# Altium PCB PCB1.PcbDoc
Units mm, origin at the board's own origin, x right, y up, seen from the top; angles counter-clockwise.
Board outline 20.16 x 24.36 mm, 2 copper layers (Top Layer, Bottom Layer); 1 components, 0 nets, 7 pads, 163 vias.
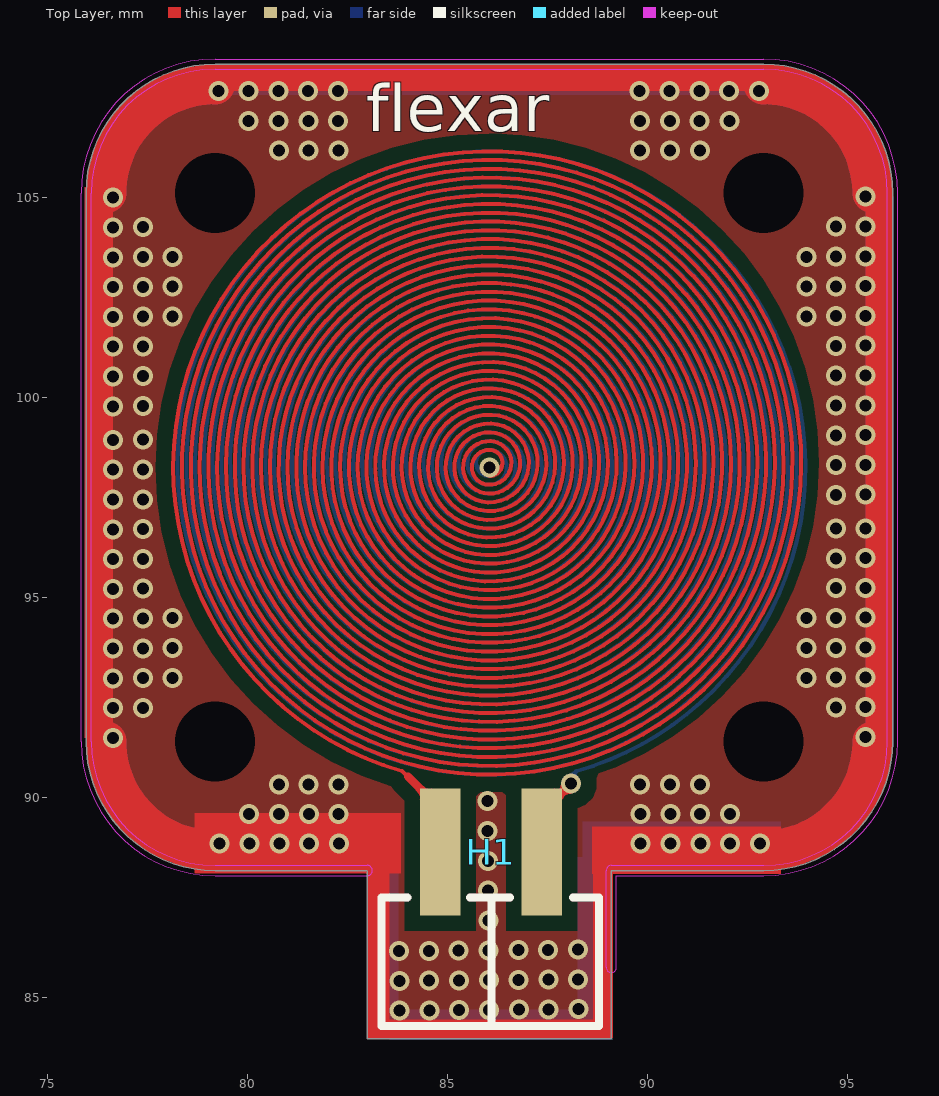
[diagram p0: Top Layer view]
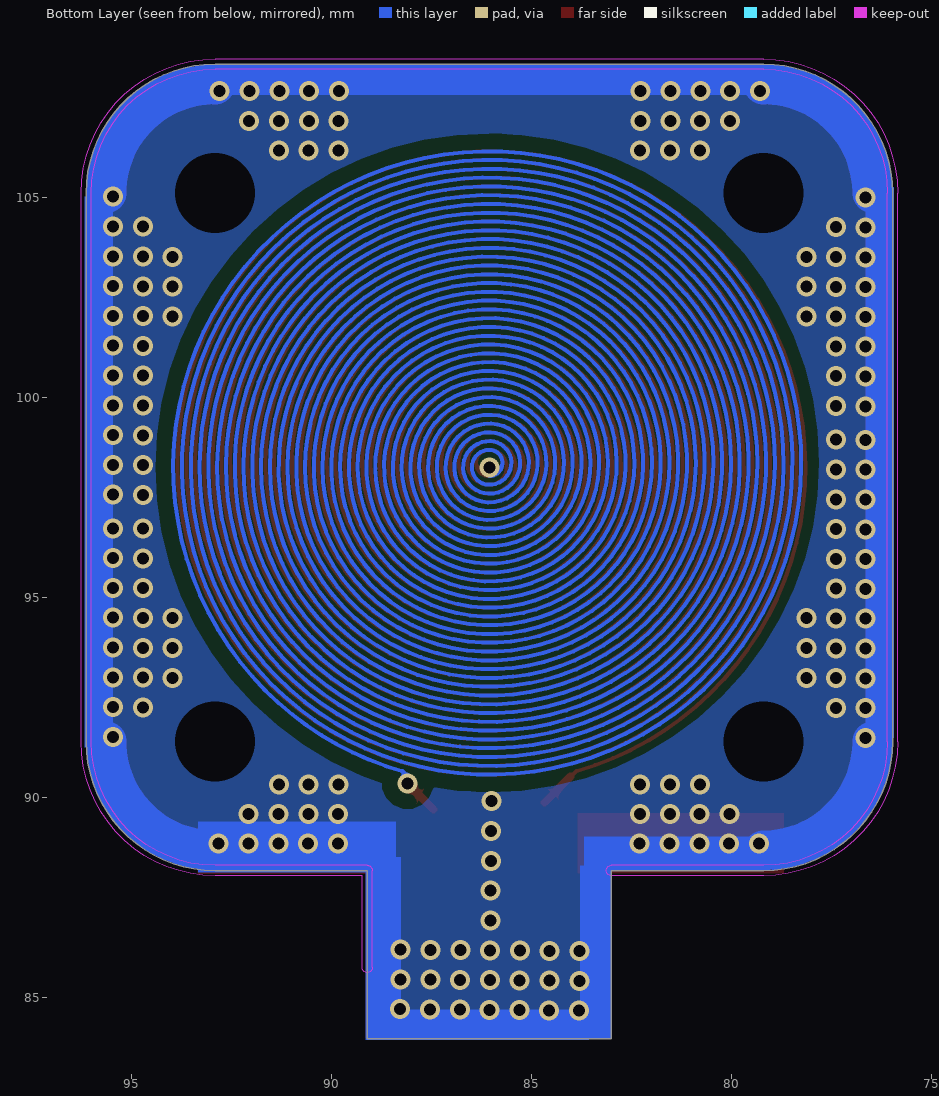
[diagram p1: Bottom Layer view, seen from below]

## Layer stack, top to bottom
Top Solder: solder mask 0.0102, Solder Resist, Dk 3.5
Top Layer: signal copper 0.0356
Dielectric 1: dielectric 0.32, FR-4, Dk 4.8
Bottom Layer: signal copper 0.0356
Bottom Solder: solder mask 0.0102, Solder Resist, Dk 3.5

## Board outline
79.201,88.183 cw(c79.201,91.406) 75.977,91.406 75.977,105.119 cw(c79.201,105.119) 79.201,108.343 92.914,108.343 cw(c92.914,105.119) 96.138,105.119 96.138,91.406 cw(c92.914,91.406) 92.914,88.183 89.108,88.183 89.108,83.981 83.006,83.981 83.006,88.183

## Design rules (kind name [scope] priority, off if disabled: settings)
Clearance [All] p1: gap=0.254 ignorepadtopadclearanceinfootprint=FALSE except(0: Arc-Hole Track-Hole SMDPad-Hole THPad-Hole Via-Hole Fill-Hole Poly-Hole Region-Hole Text-Hole)
PolygonConnect [All] p1: connectstyle=Relief reliefconductorwidth=0.254 reliefentries=4 polygonreliefangle="90 Angle" airgapwidth=0.254
RoutingVias [All] p1: holewidth=0.711 width=1.27 viastyle="Through Hole" minholewidth=0.711 minwidth=1.27 maxholewidth=0.711 maxwidth=1.27
SolderMaskExpansion [All] p1: expansion=0 istentingtop=FALSE
Width [All] p1: maxlimit=0.254 minlimit=0.254 preferedwidth=0.254
30 further rules are at their usual default settings.

## Components (designator, comment, footprint, x,y, rotation, side; value= is the part's Value field where it differs from the comment)
H1 "H2P2.54" M20-8890245R 86.715,90.951 r180 top

## Footprints (in the part's own frame and the unit in brackets; to place one, negate y for a bottom-side part, rotate by r counter-clockwise, add the part's x,y. Pads: shape width x height; smd on the part's side, far side on the other; paste and mask are expansions set on the pad)
M20-8890245R [mm]
  rect 1.02x3.17 smd: 1(-0.653,2.307) 2(1.887,2.307)
  silkscreen extent -2.08,3.44 3.35,6.65, body extent -1.92,0.84 3.16,12.34, height 2.5

## Free pads (board coordinates)
  round 0 hole 2: ""(79.201,91.406) ""(79.201,105.119) ""(92.914,91.406) ""(92.914,105.119) ""(92.914,105.119)

## Via types
v1: diameter 0.5, hole 0.3, Top Layer to Bottom Layer, tented both sides, 163 vias

## Nets (pads, with @x,y where several pads share a name; then routed paths per layer and width w, separated by ;. In a path a pad name is that pad's centre, name@x,y a point inside that pad or via, vN(x,y) a via of type N, cw(c..) or ccw(c..) an arc to the next point about the centre after c; other vN are vias at no path point)
pads on no net: H1.1 H1.2
copper on no net: | length 1843.7
  Top Layer w0.1: 83.879,90.666 cw(c86.057,98.263) 86.373,106.16 cw(c86.062,98.373) 85.751,90.585 cw(c86.057,98.263) 86.364,105.94 cw(c86.062,98.373) 85.759,90.805 cw(c86.057,98.263) 86.355,105.721 cw(c86.062,98.373) 85.768,91.024 cw(c86.057,98.263) 86.347,105.501 cw(c86.062,98.373) 85.777,91.244 cw(c86.057,98.263) 86.338,105.282 cw(c86.062,98.373) 85.786,91.463 cw(c86.057,98.263) 86.329,105.063 cw(c86.062,98.373) 85.795,91.682 cw(c86.057,98.263) 86.32,104.843 cw(c86.062,98.373) 85.803,91.902 cw(c86.057,98.263) 86.312,104.624 cw(c86.062,98.373) 85.812,92.121 cw(c86.057,98.263) 86.303,104.404 cw(c86.062,98.373) 85.821,92.341 cw(c86.057,98.263) 86.294,104.185 cw(c86.062,98.373) 85.83,92.56 cw(c86.057,98.263) 86.285,103.965 cw(c86.062,98.373) 85.838,92.78 cw(c86.057,98.263) 86.277,103.746 cw(c86.062,98.373) 85.847,92.999 cw(c86.057,98.263) 86.268,103.526 cw(c86.062,98.373) 85.856,93.219 cw(c86.057,98.263) 86.259,103.307 cw(c86.062,98.373) 85.865,93.438 cw(c86.057,98.263) 86.25,103.087 cw(c86.062,98.373) 85.873,93.658 cw(c86.057,98.263) 86.241,102.868 cw(c86.062,98.373) 85.882,93.877 cw(c86.057,98.263) 86.233,102.648 cw(c86.062,98.373) 85.891,94.097 cw(c86.057,98.263) 86.224,102.429 cw(c86.062,98.373) 85.9,94.316 cw(c86.057,98.263) 86.215,102.21 cw(c86.062,98.373) 85.909,94.535 cw(c86.057,98.263) 86.206,101.99 cw(c86.062,98.373) 85.917,94.755 cw(c86.057,98.263) 86.198,101.771 cw(c86.062,98.373) 85.926,94.974 cw(c86.057,98.263) 86.189,101.551 cw(c86.062,98.373) 85.935,95.194 cw(c86.057,98.263) 86.18,101.332 cw(c86.062,98.373) 85.944,95.413 cw(c86.057,98.263) 86.171,101.112 cw(c86.062,98.373) 85.952,95.633 cw(c86.057,98.263) 86.163,100.893 cw(c86.062,98.373) 85.961,95.852 cw(c86.057,98.263) 86.154,100.673 cw(c86.062,98.373) 85.97,96.072 cw(c86.057,98.263) 86.145,100.454 cw(c86.062,98.373) 85.979,96.291 cw(c86.057,98.263) 86.136,100.234 cw(c86.062,98.373) 85.987,96.511 cw(c86.057,98.263) 86.127,100.015 cw(c86.062,98.373) 85.996,96.73 cw(c86.057,98.263) 86.119,99.796 cw(c86.062,98.373) 86.005,96.949 cw(c86.057,98.263) 86.11,99.576 cw(c86.062,98.373) 86.014,97.169 cw(c86.057,98.263) 86.101,99.357 cw(c86.062,98.373) 86.023,97.388 cw(c86.057,98.263) 86.092,99.137 cw(c86.062,98.373) 86.031,97.608 cw(c86.057,98.263) 86.084,98.918 cw(c86.062,98.373) 86.04,97.827 cw(c86.057,98.263) 86.057,98.699 cw(c86.062,98.373) 86.057,98.046 v1(86.057,98.263)
  Top Layer w0.102: 83.879,90.666 84.526,90.018
  Top Layer w0.2: 84.026,90.531 84.674,89.884 ; 87.454,89.708 v1(88.102,90.356)
  Top Layer w1: v1@76.481,91.406 ccw(c79.201,91.406) v1@79.201,88.686 ; v1@76.481,105.119 cw(c79.201,105.119) v1@79.201,107.839 ; v1@92.914,88.686 ccw(c92.914,91.406) v1@95.634,91.406 ; v1@92.914,107.839 cw(c92.914,105.119) v1@95.634,105.119
  Bottom Layer w0.1: v1(86.057,98.263) 86.057,98.046 cw(c86.053,98.373) 86.057,98.699 cw(c86.057,98.263) 86.075,97.827 cw(c86.053,98.373) 86.031,98.918 cw(c86.057,98.263) 86.084,97.608 cw(c86.053,98.373) 86.023,99.137 cw(c86.057,98.263) 86.092,97.388 cw(c86.053,98.373) 86.014,99.357 cw(c86.057,98.263) 86.101,97.169 cw(c86.053,98.373) 86.005,99.576 cw(c86.057,98.263) 86.11,96.949 cw(c86.053,98.373) 85.996,99.796 cw(c86.057,98.263) 86.119,96.73 cw(c86.053,98.373) 85.987,100.015 cw(c86.057,98.263) 86.127,96.511 cw(c86.053,98.373) 85.979,100.234 cw(c86.057,98.263) 86.136,96.291 cw(c86.053,98.373) 85.97,100.454 cw(c86.057,98.263) 86.145,96.072 cw(c86.053,98.373) 85.961,100.673 cw(c86.057,98.263) 86.154,95.852 cw(c86.053,98.373) 85.952,100.893 cw(c86.057,98.263) 86.163,95.633 cw(c86.053,98.373) 85.944,101.112 cw(c86.057,98.263) 86.171,95.413 cw(c86.053,98.373) 85.935,101.332 cw(c86.057,98.263) 86.18,95.194 cw(c86.053,98.373) 85.926,101.551 cw(c86.057,98.263) 86.189,94.974 cw(c86.053,98.373) 85.917,101.771 cw(c86.057,98.263) 86.198,94.755 cw(c86.053,98.373) 85.909,101.99 cw(c86.057,98.263) 86.206,94.535 cw(c86.053,98.373) 85.9,102.21 cw(c86.057,98.263) 86.215,94.316 cw(c86.053,98.373) 85.891,102.429 cw(c86.057,98.263) 86.224,94.097 cw(c86.053,98.373) 85.882,102.648 cw(c86.057,98.263) 86.233,93.877 cw(c86.053,98.373) 85.873,102.868 cw(c86.057,98.263) 86.241,93.658 cw(c86.053,98.373) 85.865,103.087 cw(c86.057,98.263) 86.25,93.438 cw(c86.053,98.373) 85.856,103.307 cw(c86.057,98.263) 86.259,93.219 cw(c86.053,98.373) 85.847,103.526 cw(c86.057,98.263) 86.268,92.999 cw(c86.053,98.373) 85.838,103.746 cw(c86.057,98.263) 86.277,92.78 cw(c86.053,98.373) 85.83,103.965 cw(c86.057,98.263) 86.285,92.56 cw(c86.053,98.373) 85.821,104.185 cw(c86.057,98.263) 86.294,92.341 cw(c86.053,98.373) 85.812,104.404 cw(c86.057,98.263) 86.303,92.121 cw(c86.053,98.373) 85.803,104.624 cw(c86.057,98.263) 86.312,91.902 cw(c86.053,98.373) 85.795,104.843 cw(c86.057,98.263) 86.32,91.682 cw(c86.053,98.373) 85.786,105.063 cw(c86.057,98.263) 86.329,91.463 cw(c86.053,98.373) 85.777,105.282 cw(c86.057,98.263) 86.338,91.244 cw(c86.053,98.373) 85.768,105.501 cw(c86.057,98.263) 86.347,91.024 cw(c86.053,98.373) 85.759,105.721 cw(c86.057,98.263) 86.355,90.805 cw(c86.053,98.373) 85.751,105.94 cw(c86.057,98.263) 86.364,90.585 cw(c86.053,98.373) 85.742,106.16 cw(c86.057,98.263) 91.646,92.674 cw(c86.057,98.263) 88.233,90.665
  Bottom Layer w0.102: v1(88.102,90.356) 88.102,90.534 88.233,90.665
  Bottom Layer w1: v1@76.481,91.406 ccw(c79.201,91.406) v1@79.201,88.686 ; v1@76.481,105.119 cw(c79.201,105.119) v1@79.201,107.839 ; v1@92.914,88.686 ccw(c92.914,91.406) v1@95.634,91.406 ; v1@92.914,107.839 cw(c92.914,105.119) v1@95.634,105.119
  other v1: 83.814,84.68 84.559,84.686 85.304,84.692 86.049,84.698 86.795,84.704 87.54,84.71 88.285,84.716 83.808,85.425 84.553,85.431 85.298,85.437 86.044,85.443 86.789,85.449 87.534,85.455 88.279,85.461 83.802,86.171 84.547,86.177 85.292,86.182 86.038,86.188 86.783,86.194 87.528,86.2 88.273,86.206 86.032,86.934 86.026,87.679 86.02,88.424 79.317,88.861 80.062,88.861 80.807,88.861 81.552,88.861 82.297,88.861 89.843,88.861 90.588,88.861 91.333,88.861 92.078,88.861 92.823,88.861 86.014,89.169 80.055,89.6 80.8,89.6 81.545,89.6 82.29,89.6 89.837,89.6 90.582,89.6 91.327,89.6 92.072,89.6 86.008,89.914 80.794,90.339 81.539,90.339 82.284,90.339 89.831,90.339 90.576,90.339 91.321,90.339 76.655,91.497 95.46,91.522 76.655,92.242 77.394,92.248 94.72,92.261 95.46,92.267 76.655,92.987 77.394,92.993 78.134,93 93.981,93 94.72,93.006 95.46,93.012 76.655,93.732 77.394,93.738 78.134,93.745 93.981,93.745 94.72,93.751 95.46,93.757 76.655,94.477 77.394,94.483 78.134,94.49 93.981,94.49 94.72,94.496 95.46,94.502 76.655,95.222 77.394,95.228 94.72,95.241 95.46,95.247 76.655,95.967 77.394,95.973 94.72,95.986 95.46,95.992 76.655,96.712 77.394,96.718 94.72,96.731 95.46,96.737 76.655,97.457 77.394,97.463 94.72,97.572 95.46,97.578 76.655,98.202 77.394,98.208 94.72,98.317 95.46,98.323 76.655,98.947 77.394,98.953 94.72,99.062 95.46,99.068 76.655,99.789 77.394,99.795 94.72,99.807 95.46,99.813 76.655,100.534 77.394,100.54 94.72,100.552 95.46,100.558 76.655,101.279 77.394,101.285 94.72,101.297 95.46,101.303 76.655,102.024 77.394,102.03 78.134,102.036 93.981,102.036 94.72,102.042 95.46,102.048 76.655,102.769 77.394,102.775 78.134,102.781 93.981,102.781 94.72,102.787 95.46,102.793 76.655,103.514 77.394,103.52 78.134,103.526 93.981,103.526 93.981,103.526 94.72,103.532 94.72,103.532 95.46,103.538 76.655,104.259 77.394,104.265 94.72,104.277 94.72,104.277 95.46,104.283 76.655,105.004 95.46,105.028 80.794,106.187 81.539,106.187 82.284,106.187 89.831,106.187 90.576,106.187 91.321,106.187 80.043,106.926 80.788,106.926 81.533,106.926 82.278,106.926 89.824,106.926 90.569,106.926 91.314,106.926 92.059,106.926 79.292,107.665 80.037,107.665 80.782,107.665 81.527,107.665 82.272,107.665 89.818,107.665 90.563,107.665 91.308,107.665 92.053,107.665 92.798,107.665

## Polygon pours and split planes (outlines as drawn)
no net on Top Layer "NONET_L-01_P-001" (solid, remove dead copper, pour order 0): 97.414,83.779 97.414,86.765 97.414,109.747 74.701,109.747 74.574,109.619 74.574,83.816
no net on Bottom Layer "NONET_L-01_P-001" (solid, remove dead copper, pour order 1): 97.414,83.779 97.414,86.765 97.414,109.747 74.701,109.747 74.574,109.619 74.574,83.816

## Keep-outs
Keep-Out Layer:
  lines w0.01: 75.85,91.406 ccw(c79.201,91.406) 79.201,88.055 83.006,88.055 ccw(c83.006,88.183) 83.134,88.183 ccw(c83.006,88.183) 83.006,88.31 79.201,88.31 cw(c79.201,91.406) 76.105,91.406 76.105,105.119 cw(c79.201,105.119) 79.201,108.216 92.914,108.216 cw(c92.914,105.119) 96.01,105.119 96.01,91.406 cw(c92.914,91.406) 92.914,88.31 89.108,88.31 ccw(c89.108,88.183) 88.981,88.183 88.981,85.759 ccw(c89.108,85.759) 89.236,85.759 89.236,88.055 92.914,88.055 ccw(c92.914,91.406) 96.265,91.406 96.265,105.119 ccw(c92.914,105.119) 92.914,108.47 79.201,108.47 ccw(c79.201,105.119) 75.85,105.119 75.85,91.406

## Other copper
Top Layer:
  rectangle: 88.646,84.244 89.154,88.183
  rectangle: 82.997,84 89.154,84.455
  rectangle: 82.997,84 83.566,88.265
  rectangle: 75.939,91.497 76.655,105.266
  rectangle: 95.46,91.313 96.139,105.028
  rectangle: 79.292,107.665 92.972,108.335
  region: 93.354,89.284 88.625,89.284 88.625,88.099 93.354,88.099
  region: 83.852,89.625 78.69,89.625 78.69,88.114 83.852,88.114
Bottom Layer:
  rectangle: 88.265,84.328 89.154,88.519
  rectangle: 83.566,83.947 89.154,84.709
  rectangle: 83.009,83.989 83.785,88.312
  rectangle: 79.121,88.173 83.693,89.027
  rectangle: 88.392,88.138 93.345,89.408
  rectangle: 79.121,107.569 93.218,108.331
  region: 96.176,105.028 95.46,105.028 95.46,91.26 96.176,91.26
  rectangle: 75.939,91.497 76.655,105.266

## Silkscreen, mask and mechanical layers (free items; w line width, h text height)
Top Overlay:
  text "flexar" at 82.977,106.281 h2
Top Solder:
  rectangle: 89.354,106.27 93.107,108.291
  rectangle: 79.201,106.187 82.766,108.331
  region: 96.084,104.998 94.367,104.998 94.367,91.155 96.084,91.155
  region: 92.914,90.012 89.102,90.012 89.102,88.235 92.914,88.235
  region: 83.024,90.256 79.008,90.256 79.008,88.234 83.024,88.234
  region: 77.347,105.371 76.032,105.371 76.032,91.155 77.347,91.155
  lines w1.8: 77.039,97.239 ccw(c86.057,98.298) 82.119,90.116 ; 77.799,94.453 cw(c86.057,98.228) 81.862,106.28 ; 90.009,90.123 ccw(c86.057,98.298) 94.316,102.073 ; 90.253,106.28 cw(c86.057,98.228) 95.075,99.287
  lines w2.2: 78.131,103.342 cw(c79.201,105.119) 81.02,106.116 ; 91.131,106.179 cw(c92.914,105.119) 93.997,103.35 ; 77.888,103.513 cw(c79.201,105.119) 80.98,106.186 ccw(c79.201,105.119) 77.888,103.513 ; 78.118,93.176 ccw(c79.201,91.406) 80.984,90.346 cw(c79.201,91.406) 78.118,93.176 ; 91.095,90.409 ccw(c92.914,91.406) 93.984,93.184 cw(c92.914,91.406) 91.095,90.409 ; 91.13,106.178 cw(c92.914,105.119) 94.279,103.557 ccw(c92.914,105.119) 91.13,106.178
Mechanical 1:
  lines w0.254: 75.977,91.406 ccw(c79.201,91.406) 79.201,88.183 83.006,88.183 83.006,83.981 86.06,83.981 89.108,83.981 89.108,85.759 89.108,88.183 92.914,88.183 ccw(c92.914,91.406) 96.138,91.406 96.138,105.119 ccw(c92.914,105.119) 92.914,108.343 79.201,108.343 ccw(c79.201,105.119) 75.977,105.119 75.977,91.406
Mechanical 2:
  lines w0.254: 83.006,83.981 83.006,88.183 83.006,90.343 89.108,90.343 89.108,88.183 89.108,83.981 83.006,83.981
  text "Pi Bottom Stiffener" at 87.6,80.772 h1.52
Mechanical 3:
  lines w0.254: 75.977,91.406 ccw(c79.201,91.406) 79.201,88.183 83.006,88.183 83.006,90.343 89.108,90.343 89.108,88.183 92.914,88.183 ccw(c92.914,91.406) 96.138,91.406 96.138,105.119 ccw(c92.914,105.119) 92.914,108.343 79.201,108.343 ccw(c79.201,105.119) 75.977,105.119 75.977,91.406
  text "3M467" at 83.678,95.377 h1.52